# EAGLE board TopfieldClock (EAGLE 6.2)
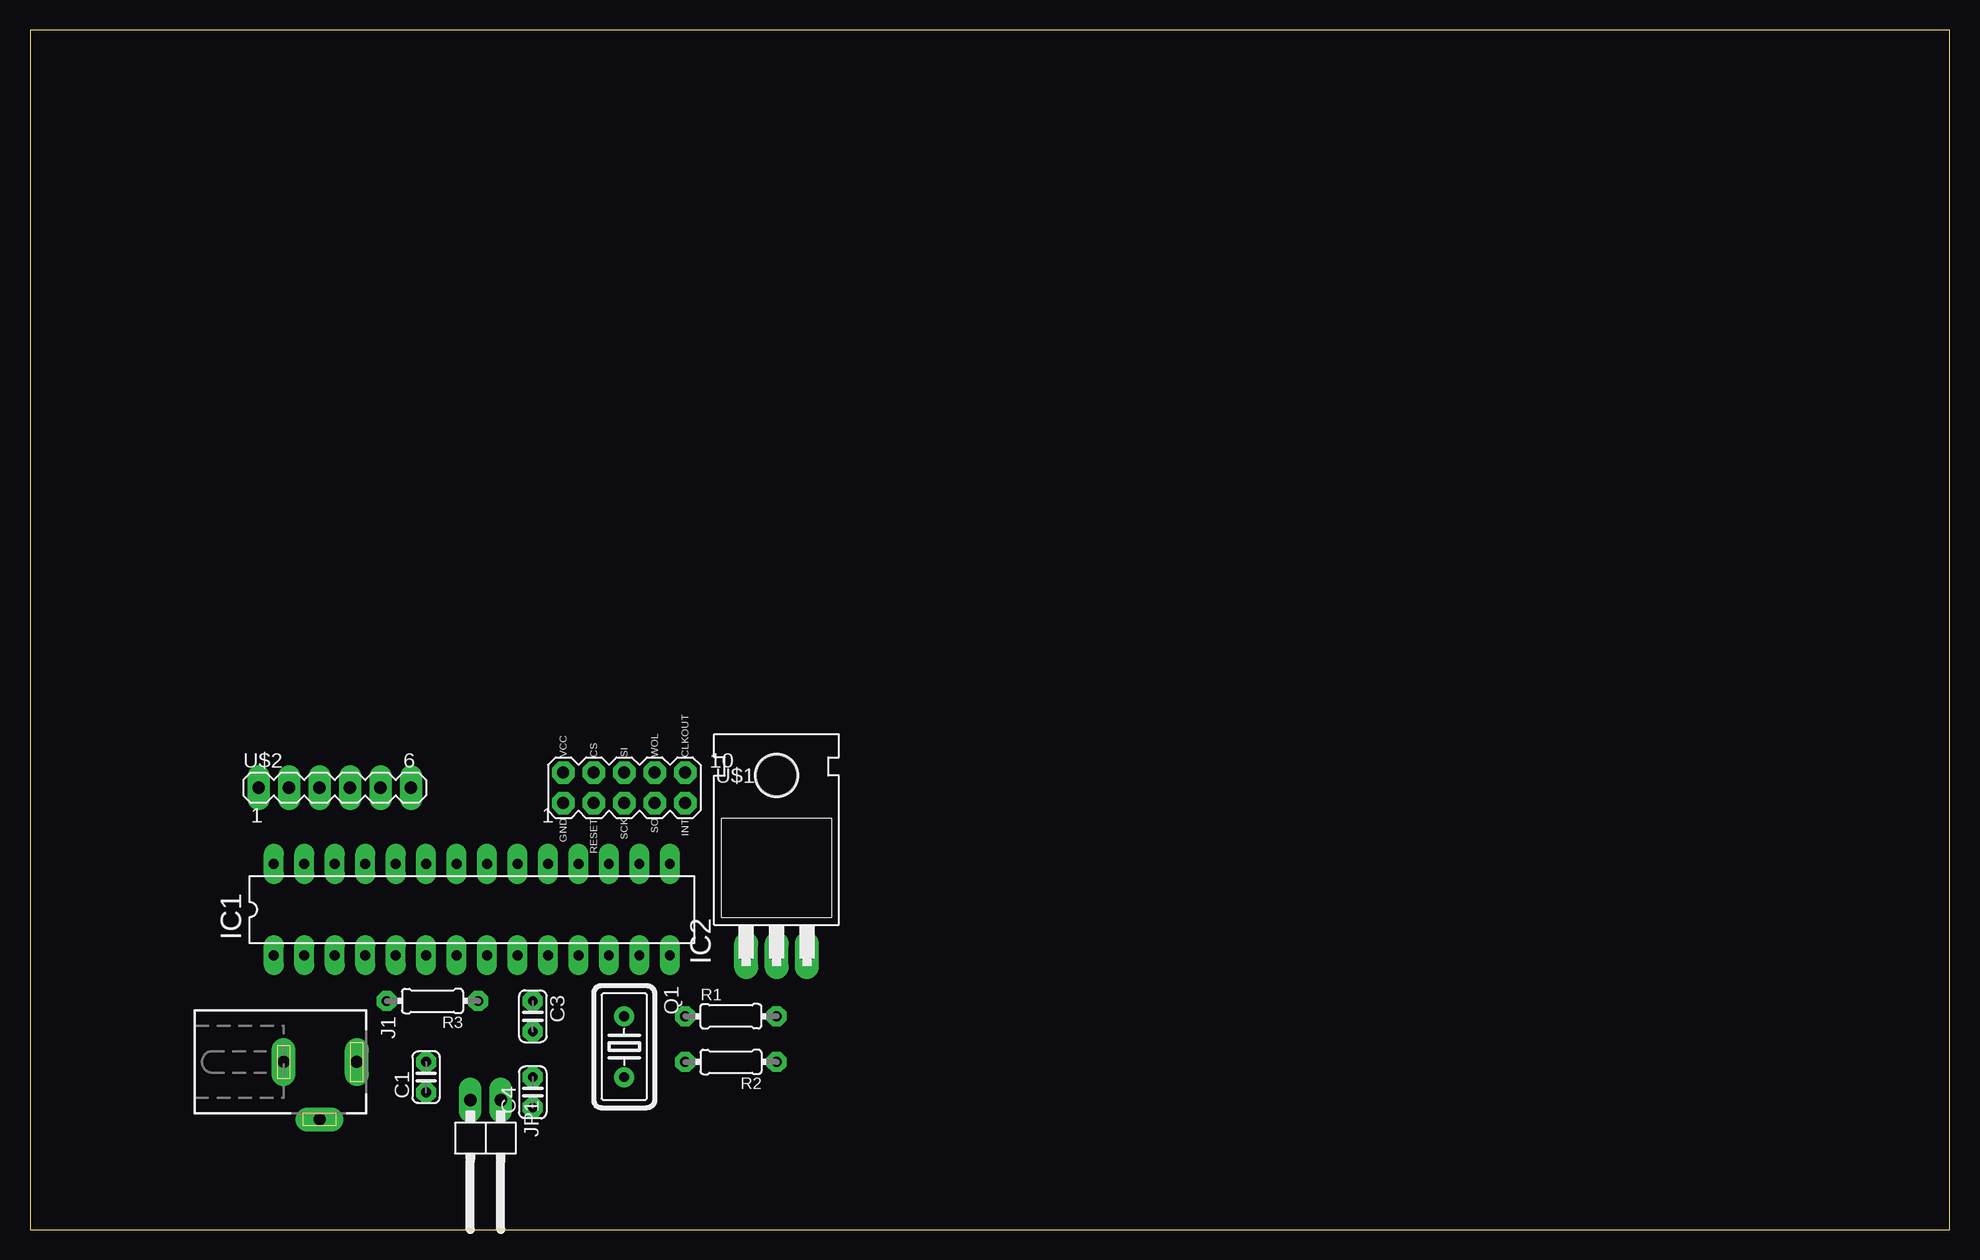
[diagram p0: board, top side]
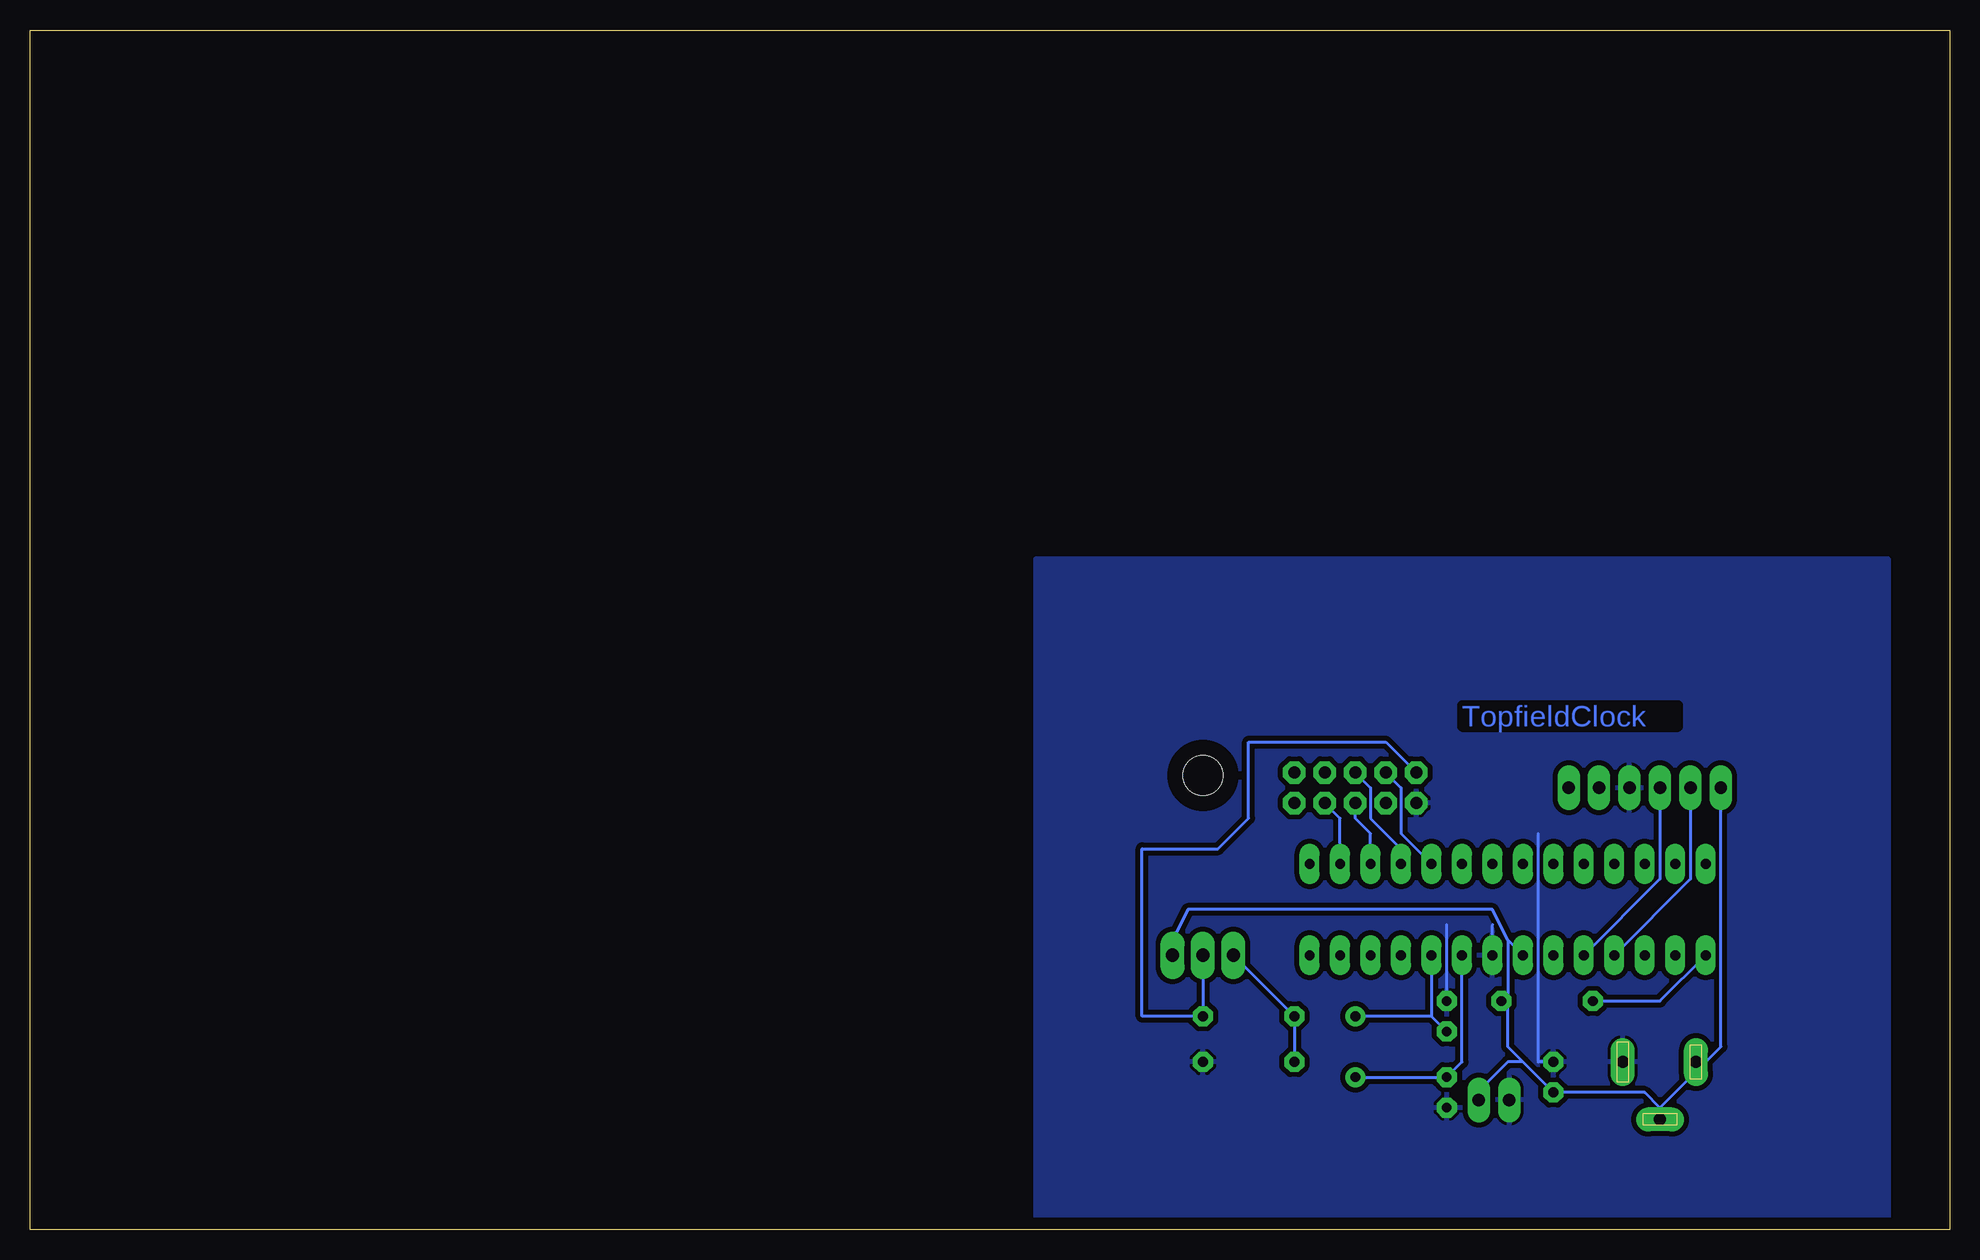
[diagram p1: board, bottom side, seen from below]

Size 160 x 100 mm. Coordinates in mm from the lower left corner, seen from the top.
Outline: 0,0 160,0 160,100 0,100 0,0
Copper layers (1*16): Top 0.035mm / dielectric 1.5mm / Bottom 0.035mm
Design rules: minimum track width 10mil, minimum drill 24mil, track to track 8mil, track to pad 8mil, pad to pad 8mil, via to via 8mil, smd to smd 8mil, copper to edge 40mil, drill to drill 8mil, minimum pad ring 17mil, minimum via ring 8mil, stop-mask expansion 4mil, vias tented up to drill 0mil, thermal gap 10mil

## Footprints (pad centres in the part's own frame; a part is rotated, then mirrored left to right if it is on the bottom)
C025-024X044 = drill 0.813 octagon: 1 -1.27,0; 2 1.27,0
DIL28-3 = drill 0.813 long: 1 -16.51,-3.81; 2 -13.97,-3.81; 3 -11.43,-3.81; 4 -8.89,-3.81; 5 -6.35,-3.81; 6 -3.81,-3.81; 7 -1.27,-3.81; 8 1.27,-3.81; 9 3.81,-3.81; 10 6.35,-3.81; 11 8.89,-3.81; 12 11.43,-3.81; 13 13.97,-3.81; 14 16.51,-3.81; 15 16.51,3.81; 16 13.97,3.81; 17 11.43,3.81; 18 8.89,3.81; 19 6.35,3.81; 20 3.81,3.81; 21 1.27,3.81; 22 -1.27,3.81; 23 -3.81,3.81; 24 -6.35,3.81; 25 -8.89,3.81; 26 -11.43,3.81; 27 -13.97,3.81; 28 -16.51,3.81
TO220H = drill 1.118 long: 1 -2.54,-10.16; 2 0,-10.16; 3 2.54,-10.16 | hole 3.302: 0,4.826
DCJ0202 = drill 1 pad 2 long: 1 0,3.1; 2 4.8,0; 3 0,-3
1X02/90 = drill 1.016 long: 1 -1.27,-3.81; 2 1.27,-3.81
HC18U-V = drill 0.813: 1 -2.54,0; 2 2.54,0
0204/7 = drill 0.813 octagon: 1 -3.81,0; 2 3.81,0
ENC28J60MODULECONN = drill 1.016 octagon: 1 -5.08,-1.27; 2 -5.08,1.27; 3 -2.54,-1.27; 4 -2.54,1.27; 5 0,-1.27; 6 0,1.27; 7 2.54,-1.27; 8 2.54,1.27; 9 5.08,-1.27; 10 5.08,1.27
MA06-1 = drill 1.016 long: 1 -6.35,0; 2 -3.81,0; 3 -1.27,0; 4 1.27,0; 5 3.81,0; 6 6.35,0

## Placement (x,y rotation side)
C1  1u  [C025-024X044]  33.02,12.7 90 top
C3  22p  [C025-024X044]  41.91,17.78 270 top
C4  22p  [C025-024X044]  41.91,11.43 90 top
IC1  ATMEGA168-PU  [DIL28-3]  36.83,26.67 0 top
IC2  317T  [TO220H]  62.23,33.02 0 top
J1  DCJ0202  [DCJ0202]  24.13,13.97 270 top
JP1  [1X02/90]  37.97,6.99 180 top
Q1  16M  [HC18U-V]  49.53,15.24 270 top
R1  390  [0204/7]  58.42,17.78 0 top
R2  670  [0204/7]  58.42,13.97 180 top
R3  5k  [0204/7]  33.55,19.05 180 top
U$1  ENC28J60MODULEENC28J60MODULECONN  [ENC28J60MODULECONN]  49.53,36.83 0 top
U$2  TF5000FRONTPANEL  [MA06-1]  25.4,36.83 0 top

## Library data of the parts
C1 C3 C4 R1-R3 = rcl
IC1 = Arduino-AVR
IC2 = linear
J1 = con-jack; OC_FARNELL: unknown; OC_NEWARK: unknown
JP1 = pinhead
Q1 = crystal; OC_FARNELL: unknown; OC_NEWARK: unknown
U$1 U$2 = flux

## Nets
+3V3: IC2.2 R1.2 U$1.2
GND: C1.2 C3.1 C4.1 IC1.8 J1.1 JP1.2 R2.1 U$1.1 U$2.4
GND/ANALOG: IC1.22
N$1: IC1.4 U$2.2
N$2: IC1.19 U$1.4
N$3: IC1.17 U$1.5
N$4: IC1.18 U$1.6
N$5: IC1.5 U$2.3
N$6: IC1.16 U$1.7
N$7: IC2.1 R1.1 R2.2
N$8: IC1.1 R3.2
VCC: C1.1 IC1.7 IC2.3 J1.2 J1.3 JP1.1 R3.1 U$2.1
XTAL1: C4.2 IC1.9 Q1.2
XTAL2: C3.2 IC1.10 Q1.1

## Tracks (layer width: path | path; a pad name or v marks a point on that pad's centre or on a via)
+3V3
  Bottom 0.254: IC2.2 R1.2 67.31,17.78 67.31,31.75 60.96,31.75 58.42,34.29 58.42,40.64 46.99,40.64 U$1.2
GND
  Bottom 0.254: IC1.8 | IC1.8 | IC1.8 38.1,25.4 | C1.2 34.29,13.97 34.29,33.02 | C3.1 41.91,25.4
  pour Bottom (isolate 0.406): 5.08,55.88 76.2,55.88 76.2,0 5.08,0
N$1
  Bottom 0.254: IC1.4 21.59,29.21 U$2.2
N$2
  Bottom 0.254: IC1.19 45.72,33.02 45.72,36.83 U$1.4
N$3
  Bottom 0.254: IC1.17 48.26,33.02 49.53,34.29 U$1.5
N$4
  Bottom 0.254: IC1.18 45.72,31.75 48.26,34.29 48.26,36.83 U$1.6
N$5
  Bottom 0.254: IC1.5 24.13,29.21 U$2.3
N$6
  Bottom 0.254: IC1.16 50.8,34.29 U$1.7
N$7
  Bottom 0.254: R2.2 R1.1 IC2.1
N$8
  Bottom 0.254: IC1.1 24.13,19.05 29.21,19.05 R3.2
VCC
  Bottom 0.254: IC2.3 64.77,24.13 63.5,26.67 38.1,26.67 36.83,24.13 | IC1.7 36.83,24.13 | 24.13,10.16 25.4,11.43 C1.1 35.56,13.97 | U$2.1 19.05,15.24 20.32,13.97 | 20.32,13.97 24.13,10.16 | 24.13,10.16 J1.2 | 20.32,13.97 J1.3 | 36.83,24.13 36.83,19.05 | 36.83,19.05 36.83,15.24 35.56,13.97 | 36.83,19.05 R3.1 | 35.56,13.97 36.83,13.97 39.37,11.43 JP1.1
XTAL1
  Bottom 0.254: Q1.2 C4.2 40.64,13.97 IC1.9
XTAL2
  Bottom 0.254: 43.18,17.78 C3.2 | IC1.10 43.18,17.78 | 43.18,17.78 Q1.1

## Text on the board
Bottom: TopfieldClock